# EAGLE board scheme (EAGLE 5.10)
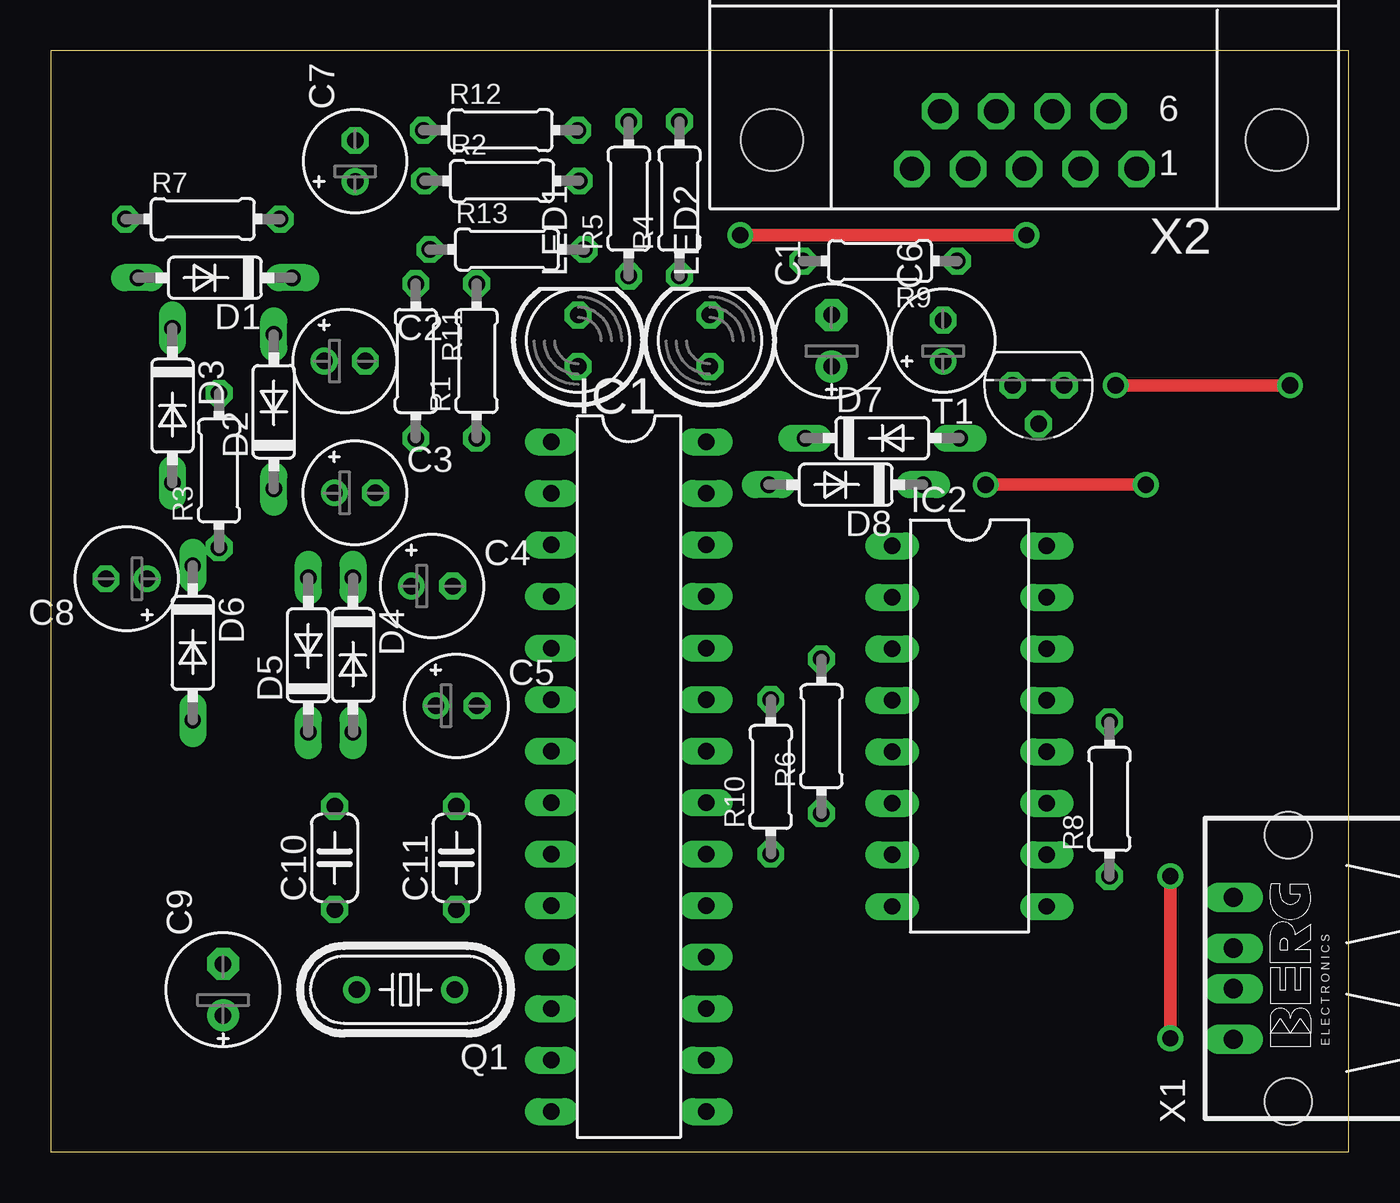
[diagram p0: board, top side]
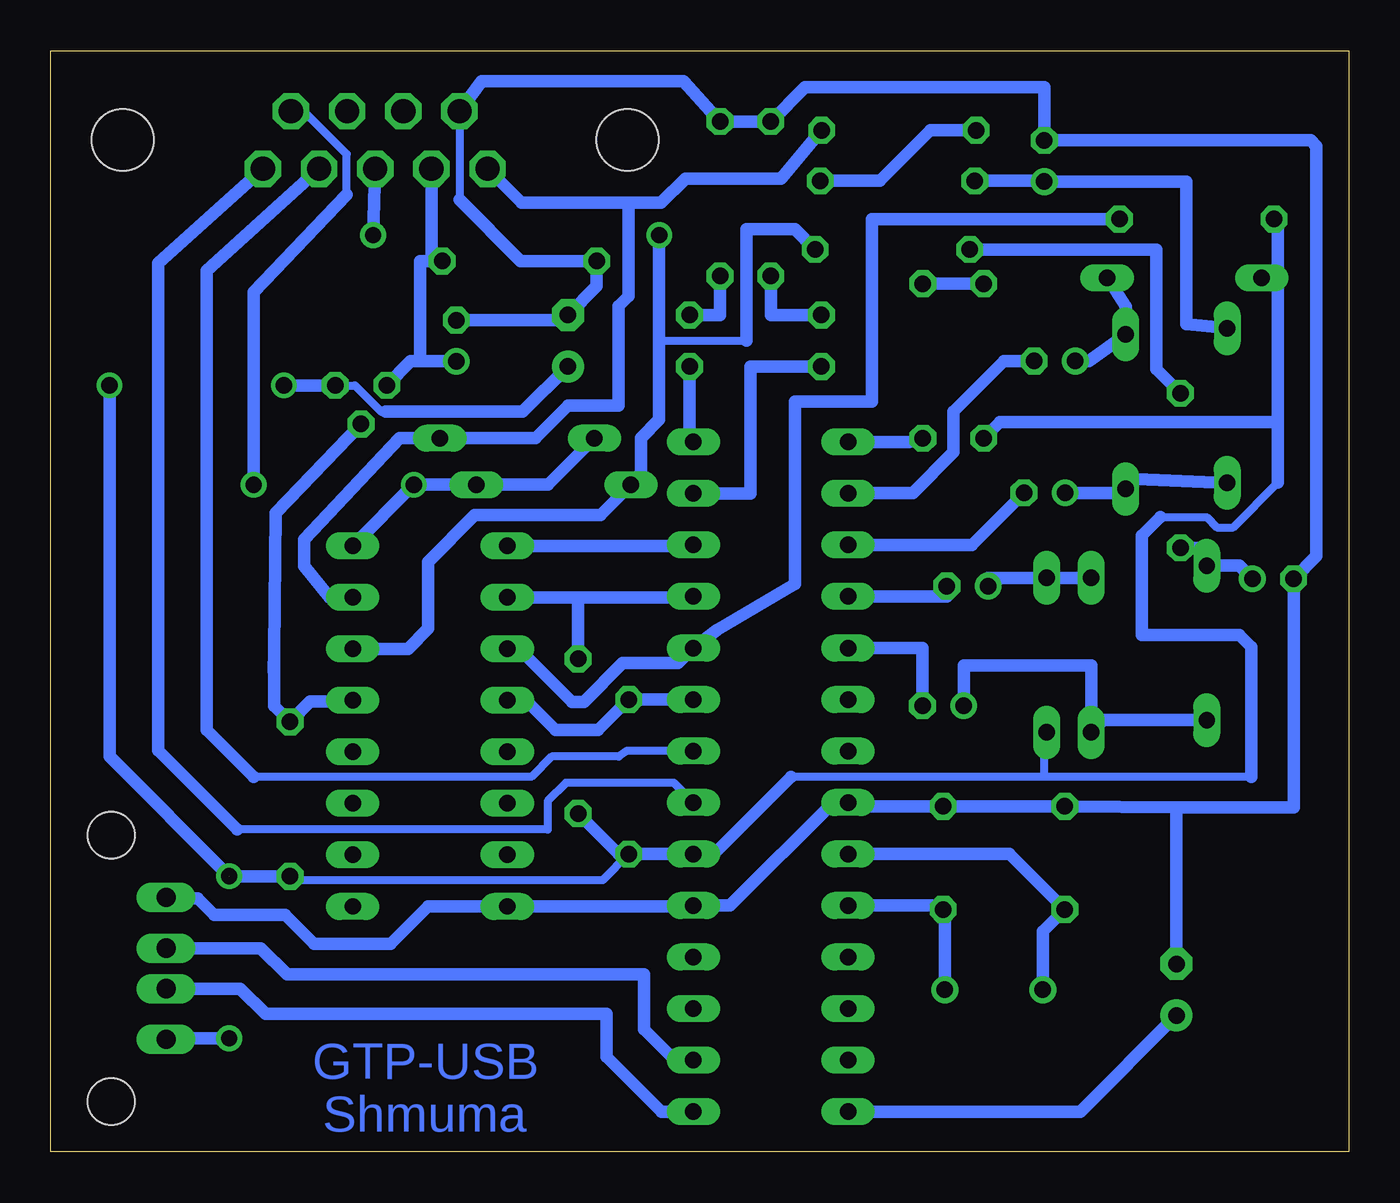
[diagram p1: board, bottom side, seen from below]

Size 64 x 54.3 mm. Coordinates in mm from the lower left corner, seen from the top.
Outline: 0,0 64,0 64,54.3 0,54.3 0,0
Copper layers (1*16): Top 0.035mm / dielectric 1.5mm / Bottom 0.035mm
Design rules "default": minimum track width 10mil, minimum drill 24mil, track to track 8mil, track to pad 8mil, pad to pad 8mil, via to via 8mil, smd to smd 8mil, copper to edge 40mil, drill to drill 8mil, minimum pad ring 10mil, minimum via ring 8mil, stop-mask expansion 4mil, vias tented up to drill 0mil, thermal gap 10mil

## Footprints (pad centres in the part's own frame; a part is rotated, then mirrored left to right if it is on the bottom)
E2,5-6E = drill 0.813 pad 1.575 round: + -1.27,0 | drill 0.813 pad 1.575 octagon: - 1.27,0
E2-5 = drill 0.813 pad 1.27 round: + -1.016,0 | drill 0.813 pad 1.27 octagon: - 1.016,0
C050-024X044 = drill 0.813 octagon: 1 -2.54,0; 2 2.54,0
DO35-7 = drill 0.813 long: A 3.81,0; C -3.81,0
DIL28-3 = drill 0.813 long: 1 -16.51,-3.81; 2 -13.97,-3.81; 3 -11.43,-3.81; 4 -8.89,-3.81; 5 -6.35,-3.81; 6 -3.81,-3.81; 7 -1.27,-3.81; 8 1.27,-3.81; 9 3.81,-3.81; 10 6.35,-3.81; 11 8.89,-3.81; 12 11.43,-3.81; 13 13.97,-3.81; 14 16.51,-3.81; 15 16.51,3.81; 16 13.97,3.81; 17 11.43,3.81; 18 8.89,3.81; 19 6.35,3.81; 20 3.81,3.81; 21 1.27,3.81; 22 -1.27,3.81; 23 -3.81,3.81; 24 -6.35,3.81; 25 -8.89,3.81; 26 -11.43,3.81; 27 -13.97,3.81; 28 -16.51,3.81
DIL16 = drill 0.813 long: 1 -8.89,-3.81; 2 -6.35,-3.81; 3 -3.81,-3.81; 4 -1.27,-3.81; 5 1.27,-3.81; 6 3.81,-3.81; 7 6.35,-3.81; 8 8.89,-3.81; 9 8.89,3.81; 10 6.35,3.81; 11 3.81,3.81; 12 1.27,3.81; 13 -1.27,3.81; 14 -3.81,3.81; 15 -6.35,3.81; 16 -8.89,3.81
LED5MM = drill 0.813 octagon: A -1.27,0; K 1.27,0
HC49/S = drill 0.813 round: 1 -2.413,0; 2 2.413,0
0204/7 = drill 0.813 octagon: 1 -3.81,0; 2 3.81,0
TO92 = drill 0.813 octagon: 1 1.27,0; 2 0,1.905; 3 -1.27,0
PN87520 = drill 0.95 long: 1 -3.5,2.71; 2 -1,2.71; 3 1,2.71; 4 3.5,2.71 | hole 2.3: -6.57,0; 6.57,0
182-009-MALE = drill 1.194 pad 1.524 octagon: 1 -5.537,10.923; 2 -2.769,10.923; 3 0,10.923; 4 2.769,10.923; 5 5.537,10.923; 6 -4.153,8.08; 7 -1.384,8.08; 8 1.384,8.08; 9 4.153,8.08 | hole 3.048: -12.446,9.501; 12.446,9.501

## Placement (x,y rotation side)
C1  100uF  [E2,5-6E]  38.5,40 90 top
C2  1uF  [E2-5]  14.5,39 0 top
C3  1uF  [E2-5]  15,32.5 0 top
C4  1uF  [E2-5]  18.8,27.9 0 top
C5  1uF  [E2-5]  20,22 0 top
C6  1uF  [E2-5]  44,40 90 top
C7  22uF  [E2-5]  15.01,48.86 90 top
C8  22uF  [E2-5]  3.74,28.26 180 top
C9  47uF  [E2,5-6E]  8.5,8 90 top
C10  10pF  [C050-024X044]  14,14.5 90 top
C11  10pF  [C050-024X044]  20,14.5 90 top
D1  [DO35-7]  8.1,43.1 180 top
D2  [DO35-7]  11,36.5 90 top
D3  [DO35-7]  6,36.8 270 top
D4  [DO35-7]  14.9,24.5 270 top
D5  [DO35-7]  12.7,24.5 90 top
D6  [DO35-7]  7,25.1 270 top
D7  [DO35-7]  41,35.2 0 top
D8  [DO35-7]  39.2,32.9 180 top
IC1  PIC18F2550_28DIP  [DIL28-3]  28.5,18.5 270 top
IC2  ULN2003AN  [DIL16]  45.3,21 270 top
LED1  L1  [LED5MM]  26,40 90 top
LED2  L2  [LED5MM]  32.5,40 90 top
Q1  12 MHz  [HC49/S]  17.5,8 180 top
R1  2k  [0204/7]  21,39 90 top
R2  2k  [0204/7]  22.25,47.88 0 top
R3  2k  [0204/7]  8.3,33.6 90 top
R4  1k  [0204/7]  31,47 90 top
R5  1k  [0204/7]  28.5,47 90 top
R6  10k  [0204/7]  38,20.5 90 top
R7  10k  [0204/7]  7.5,46 0 top
R8  1k  [0204/7]  52.2,17.4 90 top
R9  10k  [0204/7]  40.89,43.93 180 top
R10  10k  [0204/7]  35.5,18.5 90 top
R11  220  [0204/7]  18,39 270 top
R12  220  [0204/7]  22.18,50.38 0 top
R13  220  [0204/7]  22.5,44.5 0 top
T1  BC337  [TO92]  48.7,37.8 180 top
X1  USB  [PN87520]  61.02,9.05 90 top
X2  ADP  [182-009-MALE]  48,59.4 180 top

## Library data of the parts
C1-C11 R1-R13 = resistor
D1-D8 = diode
IC1 = microchip
IC2 = uln-udn
LED1 LED2 = led
Q1 = crystal
T1 = transistor
X1 = con-berg
X2 = con-subd

## Nets
+5V: C1.+ D1.A D4.A IC1.20 R6.1 R7.1 R8.1 R10.1 R11.2 T1.3 X1.1
GND: C1.- C6.- C7.- C8.- C9.- C10.2 C11.2 IC1.8 IC1.19 IC2.8 R4.2 R5.2 R9.2 X1.4 X2.9
N$1: IC1.15 X1.2
N$2: IC1.16 X1.3
N$3: IC1.27 LED1.A
N$4: C9.+ IC1.14
N$5: IC1.1 R1.1
N$6: C2.+ D1.C D2.A
N$7: R1.2 R11.1
N$8: C2.- IC1.2
N$9: C3.+ D2.C D3.A
N$10: C3.- IC1.3
N$11: C10.1 IC1.9 Q1.2
N$12: C7.+ D3.C R2.1
N$13: R2.2 R12.1
N$14: C4.- IC1.4
N$15: C4.+ D4.C D5.A
N$16: C5.- IC1.5
N$18: R3.2 R13.1
N$19: C11.1 IC1.10 Q1.1
N$21: IC1.24 IC2.3 R7.2
N$22: LED2.K R4.1
N$23: LED1.K R5.1
N$24: IC1.28 LED2.A
N$26: D7.A IC2.15 R12.2 X2.5
N$27: IC1.23 IC2.4 R10.2
N$28: D7.C D8.C IC2.16 X2.6
N$29: IC1.26 IC2.1
N$30: D8.A IC2.14 R13.2 X2.3
N$31: IC1.25 IC2.2 R6.2
N$33: C5.+ D5.C D6.A
N$35: C8.+ D6.C R3.1
N$40: IC2.13 R8.2 T1.2
N$41: IC1.22 X2.2
N$42: C6.+ R9.1 T1.1 X2.4
N$43: IC1.21 X2.1

## Tracks (layer width: path | path; a pad name or v marks a point on that pad's centre or on a via)
+5V  (via drill 0.8 pad 1.27)  (1 unrouted)
  Top 0.61: v61.1,37.8 v52.5,37.8 | v55.2,5.6 v55.2,13.6
  Bottom 0.406: R10.1 36.79,13.4 52.01,13.4 | 9.3,31.3 7,31.3 6.5,30.8 5.7,30.8 3.5,33 | 47.5,36.5 47.7,36.5 49,37.8 T1.3 | 4.8,18.5 15,18.5 | 15,18.5 27.5,18.5 | 15,18.5 15,20.8
  Bottom 0.61: R6.1 36,14.69 R10.1 IC1.20 31.31,14.69 27.5,18.5 | R11.2 17.19,36 3.5,36 | 3.5,36 3.5,43 | 3.5,43 3.5,46 R7.1 | 3.5,43 D1.A | 9.3,31.3 10.2,30.4 10.2,25.5 5.4,25.5 4.8,24.9 4.8,18.5 | 3.5,33 3.5,36 | D4.A 14.9,20.8 15,20.8 | C1.+ 40.73,36.5 47.5,36.5 | v52.5,37.8 T1.3 | 52.01,13.4 R8.1 v55.19,13.59 | v55.2,13.6 61.1,19.5 v61.1,37.8 | X1.1 58.26,5.6 v55.2,5.6
GND
  Bottom 0.406: X2.9 43.85,46.95
  Bottom 0.61: C6.- 38.75,41.02 C1.- 37.08,42.69 R9.2 40.83,43.93 43.85,46.95 | X2.9 42.77,52.8 32.79,52.8 R4.2 R5.2 26.81,52.5 15.01,52.5 C7.- 1.88,49.88 1.6,49.6 1.6,29.38 C8.- 2.72,17 8.5,17 | X1.4 58.26,12.5 56.75,12.5 55.95,11.7 52.45,11.7 51,10.25 47.25,10.25 45.39,12.11 IC2.8 32.31,12.11 IC1.19 30.5,12.15 25.42,17.23 IC1.8 24.5,17.04 C11.2 C10.2 8.5,17 | C9.- 8.5,17
N$1
  Bottom 0.61: IC1.15 33.89,1.99 36.6,4.7 36.6,6.8 53.4,6.8 54.65,8.05 X1.2
N$2
  Bottom 0.61: IC1.16 33.23,4.53 34.75,6.05 34.75,8.75 52.35,8.75 53.65,10.05 X1.3
N$3
  Bottom 0.61: LED1.A 29.5,38.73 29.5,32.47 IC1.27
N$4
  Bottom 0.61: C9.+ 13.24,1.99 IC1.14
N$5
  Bottom 0.61: R1.1 21.68,35.01 IC1.1
N$6
  Bottom 0.61: C2.+ 12.81,39 D2.A 11,41.69 D1.C
N$7
  Bottom 0.61: R11.1 R1.2
N$8
  Bottom 0.61: C2.- 17,39 19.5,36.5 19.5,34.5 21.5,32.5 24.66,32.5 IC1.2
N$9
  Bottom 0.61: C3.+ 11.19,32.5 D2.C 10.5,33.19 D3.A
N$10
  Bottom 0.61: IC1.3 18.59,29.93 C3.-
N$11
  Bottom 0.61: IC1.9 16.73,14.69 C10.1 15.09,10.87 Q1.2
N$12
  Bottom 0.61: R2.1 15.01,47.88 C7.+ 8,47.84 8,40.81 D3.C
N$13
  Bottom 0.61: R12.1 20.62,50.38 23.12,47.88 R2.2
N$14
  Bottom 0.61: C4.- 19.82,27.39 IC1.4
N$15
  Bottom 0.61: D5.A D4.C 17.78,28.31 C4.+
N$16
  Bottom 0.61: C5.- 21.02,24.85 IC1.5
N$17  (via drill 1.2 pad 1.68)
  other vias: 61,15.6
N$18
  Bottom 0.61: R13.1 9.5,44.5 9.5,38.61 R3.2
N$19
  Bottom 0.61: IC1.10 20.19,12.15 C11.1 20,12 19.91,11.91 Q1.1
N$20  (via drill 1.2 pad 1.68)
  other vias: 61,2.5
N$21
  Bottom 0.61: 11.45,46 R7.2 23.5,46 23.5,37 27.3,37 27.3,28 31.15,25.75 IC1.24 33.06,24.1 35.8,24.1 37.7,22.2 38.3,22.2 40.9,24.8 IC2.3
N$22
  Bottom 0.61: LED2.K 31,41.27 R4.1
N$23
  Bottom 0.61: LED1.K 28.5,41.27 R5.1
N$24
  Bottom 0.61: IC1.28 32.5,35.01 LED2.A
N$25  (via drill 1.2 pad 1.68)
  other vias: 60.4,49.9
N$26
  Bottom 0.61: IC2.15 50.25,27.35 51.5,28.9 51.5,30.2 46.8,35.2 D7.A 40.1,35.2 38.5,36.8 36,36.8 36,41.7 35.5,42.2 35.5,46.8 | R12.2 27.95,48.04 27.99,48 32.7,48 33.9,46.8 35.5,46.8 | X2.5 40.79,46.8 35.5,46.8
N$27
  Bottom 0.61: IC1.23 R10.2 37.01,20.8 39.1,20.8 40.57,22.27 IC2.4
N$28  (via drill 0.8 pad 1.27)
  Top 0.61: v46.1,32.9 v54,32.9
  Bottom 0.406: X2.6 51.52,51.32 49.4,49.2 49.4,47.2 | IC2.16 48.49,29.89
  Bottom 0.61: D7.C 39.49,32.9 D8.C v46.1,32.9 IC2.16 | 49.4,47.2 54,42.4 v54,32.9
N$29
  Bottom 0.61: IC1.26 32.35,29.89 IC2.1
N$30  (via drill 0.8 pad 1.27)
  Top 0.61: v34,45.2 v48.1,45.2
  Bottom 0.406: 34,40 29.7,40
  Bottom 0.61: R13.2 27.31,45.5 29.7,45.5 29.7,40 | D8.A 34.9,32.9 | IC2.14 46.39,24.81 45.4,25.8 45.4,29.1 43.1,31.4 36.89,31.4 D8.A | v34,45.2 34,40 34,36.1 34.9,35.2 34.9,33.39 D8.A | v48.1,45.2 X2.3
N$31
  Bottom 0.61: IC1.25 32.35,27.35 37.8,27.35 38,27.35 | 38,27.35 IC2.2 | 38,27.35 R6.2
N$32  (via drill 1.2 pad 1.68)
  other vias: 35.5,49.9
N$33
  Bottom 0.61: D6.A 12.1,21.29 D5.C 12.7,24 18.98,24 C5.+
N$35
  Bottom 0.61: R3.1 6.92,29.79 D6.C 5.41,28.91 C8.+
N$40
  Bottom 0.61: IC2.13 49.17,22.21 51.2,22.21 R8.2 52.99,22 52.99,24.7 | T1.2 52.9,31.49 52.99,24.7 | 52.99,24.7 53,23.7
N$41
  Bottom 0.406: IC1.22 35.63,19.77 36,19.5 39.3,19.5 40.3,18.5 54,18.5
  Bottom 0.61: X2.2 56.3,43.45 56.3,20.8 54,18.5
N$42
  Bottom 0.61: X2.4 45.23,44.46 arc-90 R9.1 45.8,43.93 45.8,38.98 C6.+ 46.25,38.98 T1.1
N$43
  Bottom 0.406: IC1.21 33.28,18.2 38.6,18.2 39.5,17.3 39.5,15.9 54.8,15.9
  Bottom 0.61: X2.1 58.7,43.81 58.7,19.8 54.8,15.9

## Text on the board
Bottom: GTP-USB | Shmuma